# Altium PCB Display.PcbDoc
Units mm, origin at the board's own origin, x right, y up, seen from the top; angles counter-clockwise.
Board outline 50 x 50 mm, 2 copper layers (Top Layer, Bottom Layer); 9 components, 26 nets, 70 pads, 21 vias.
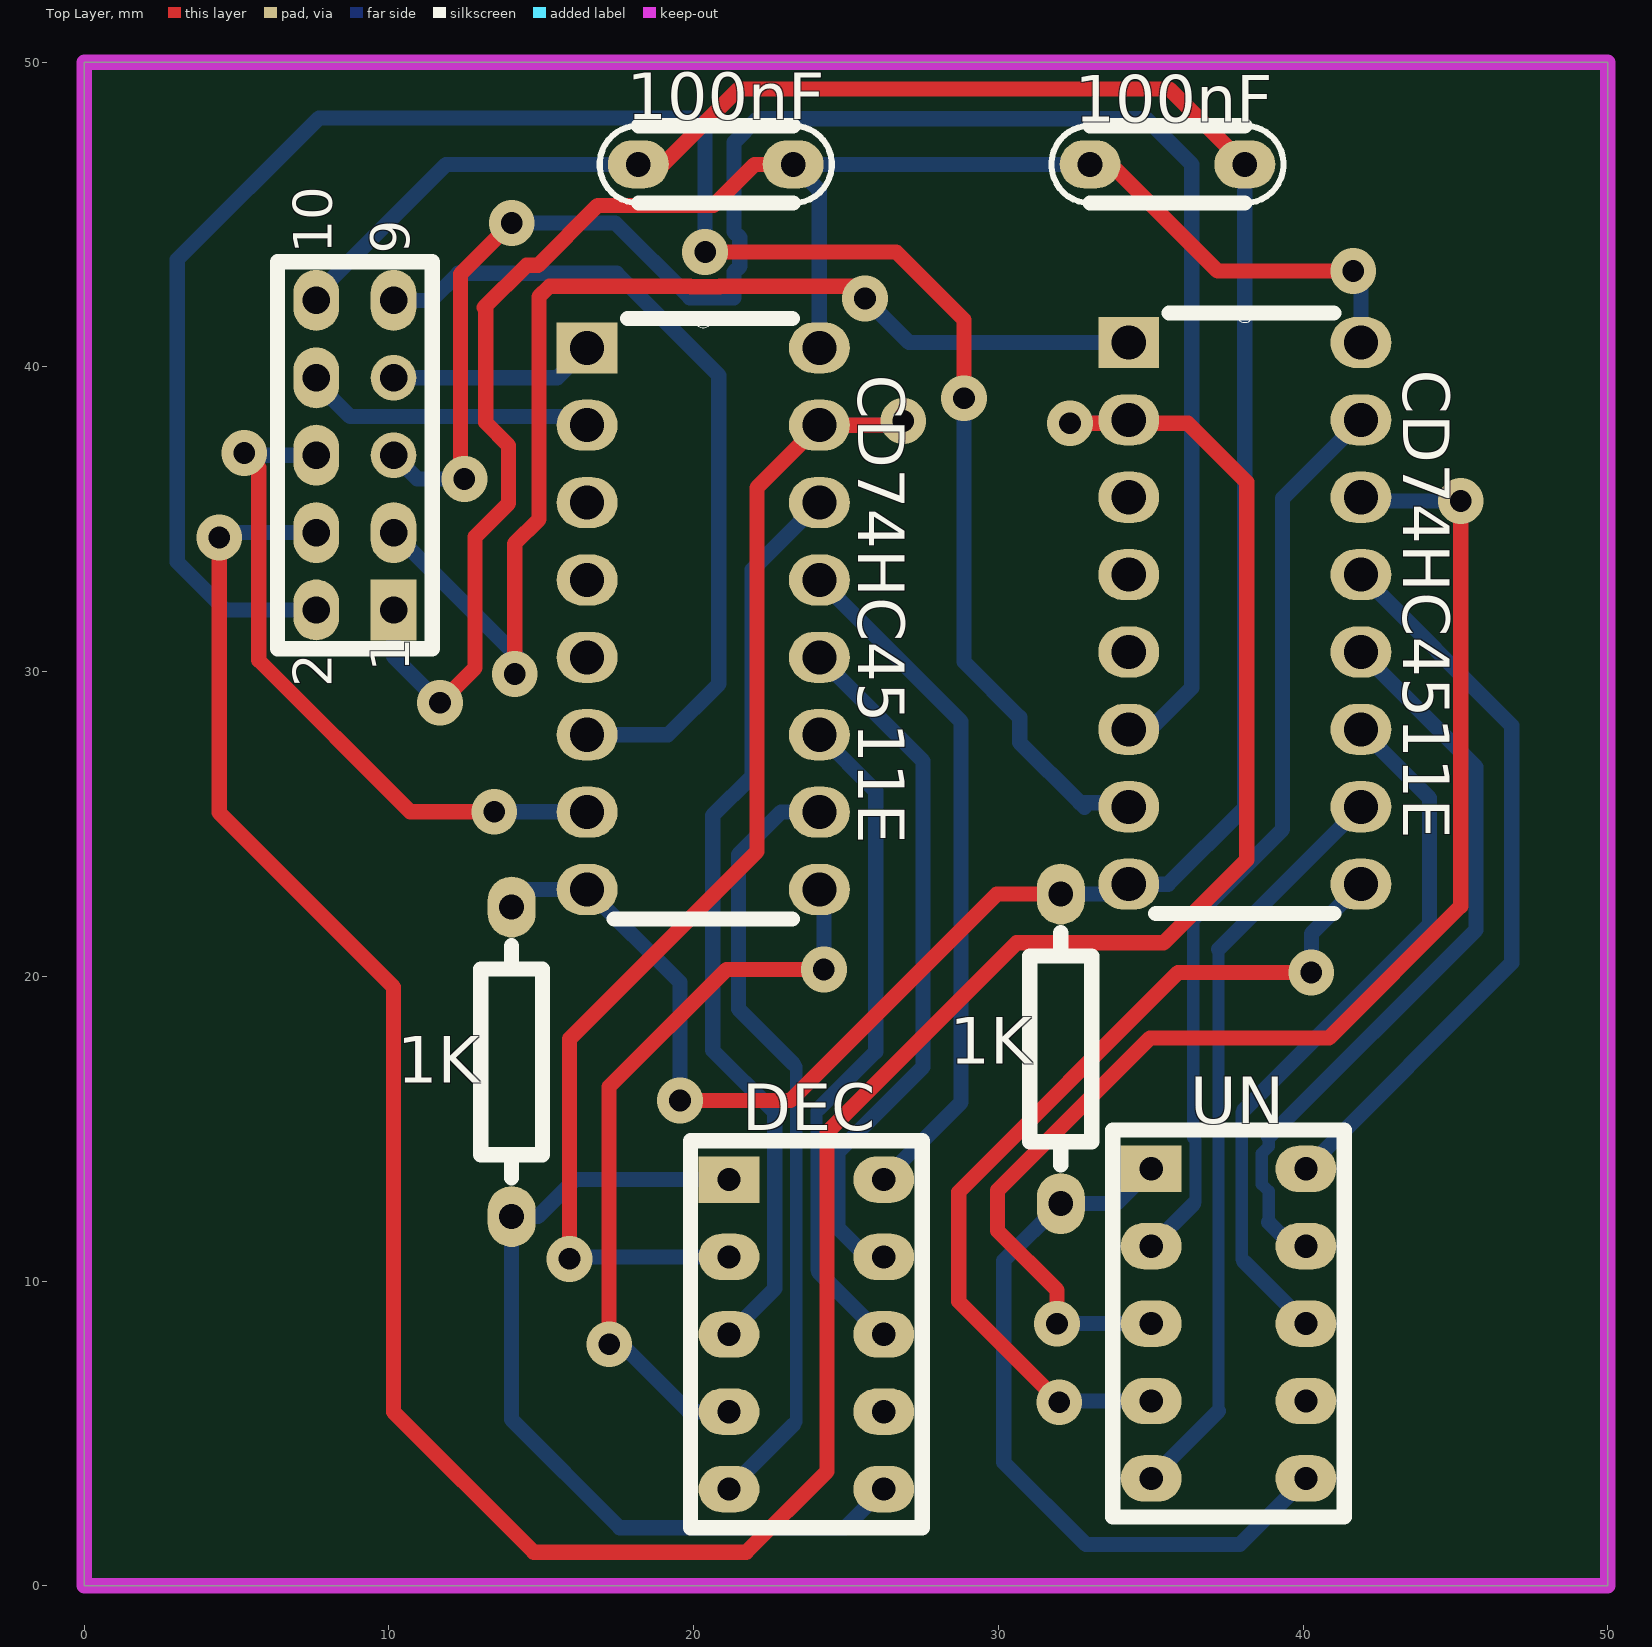
[diagram p0: Top Layer view]
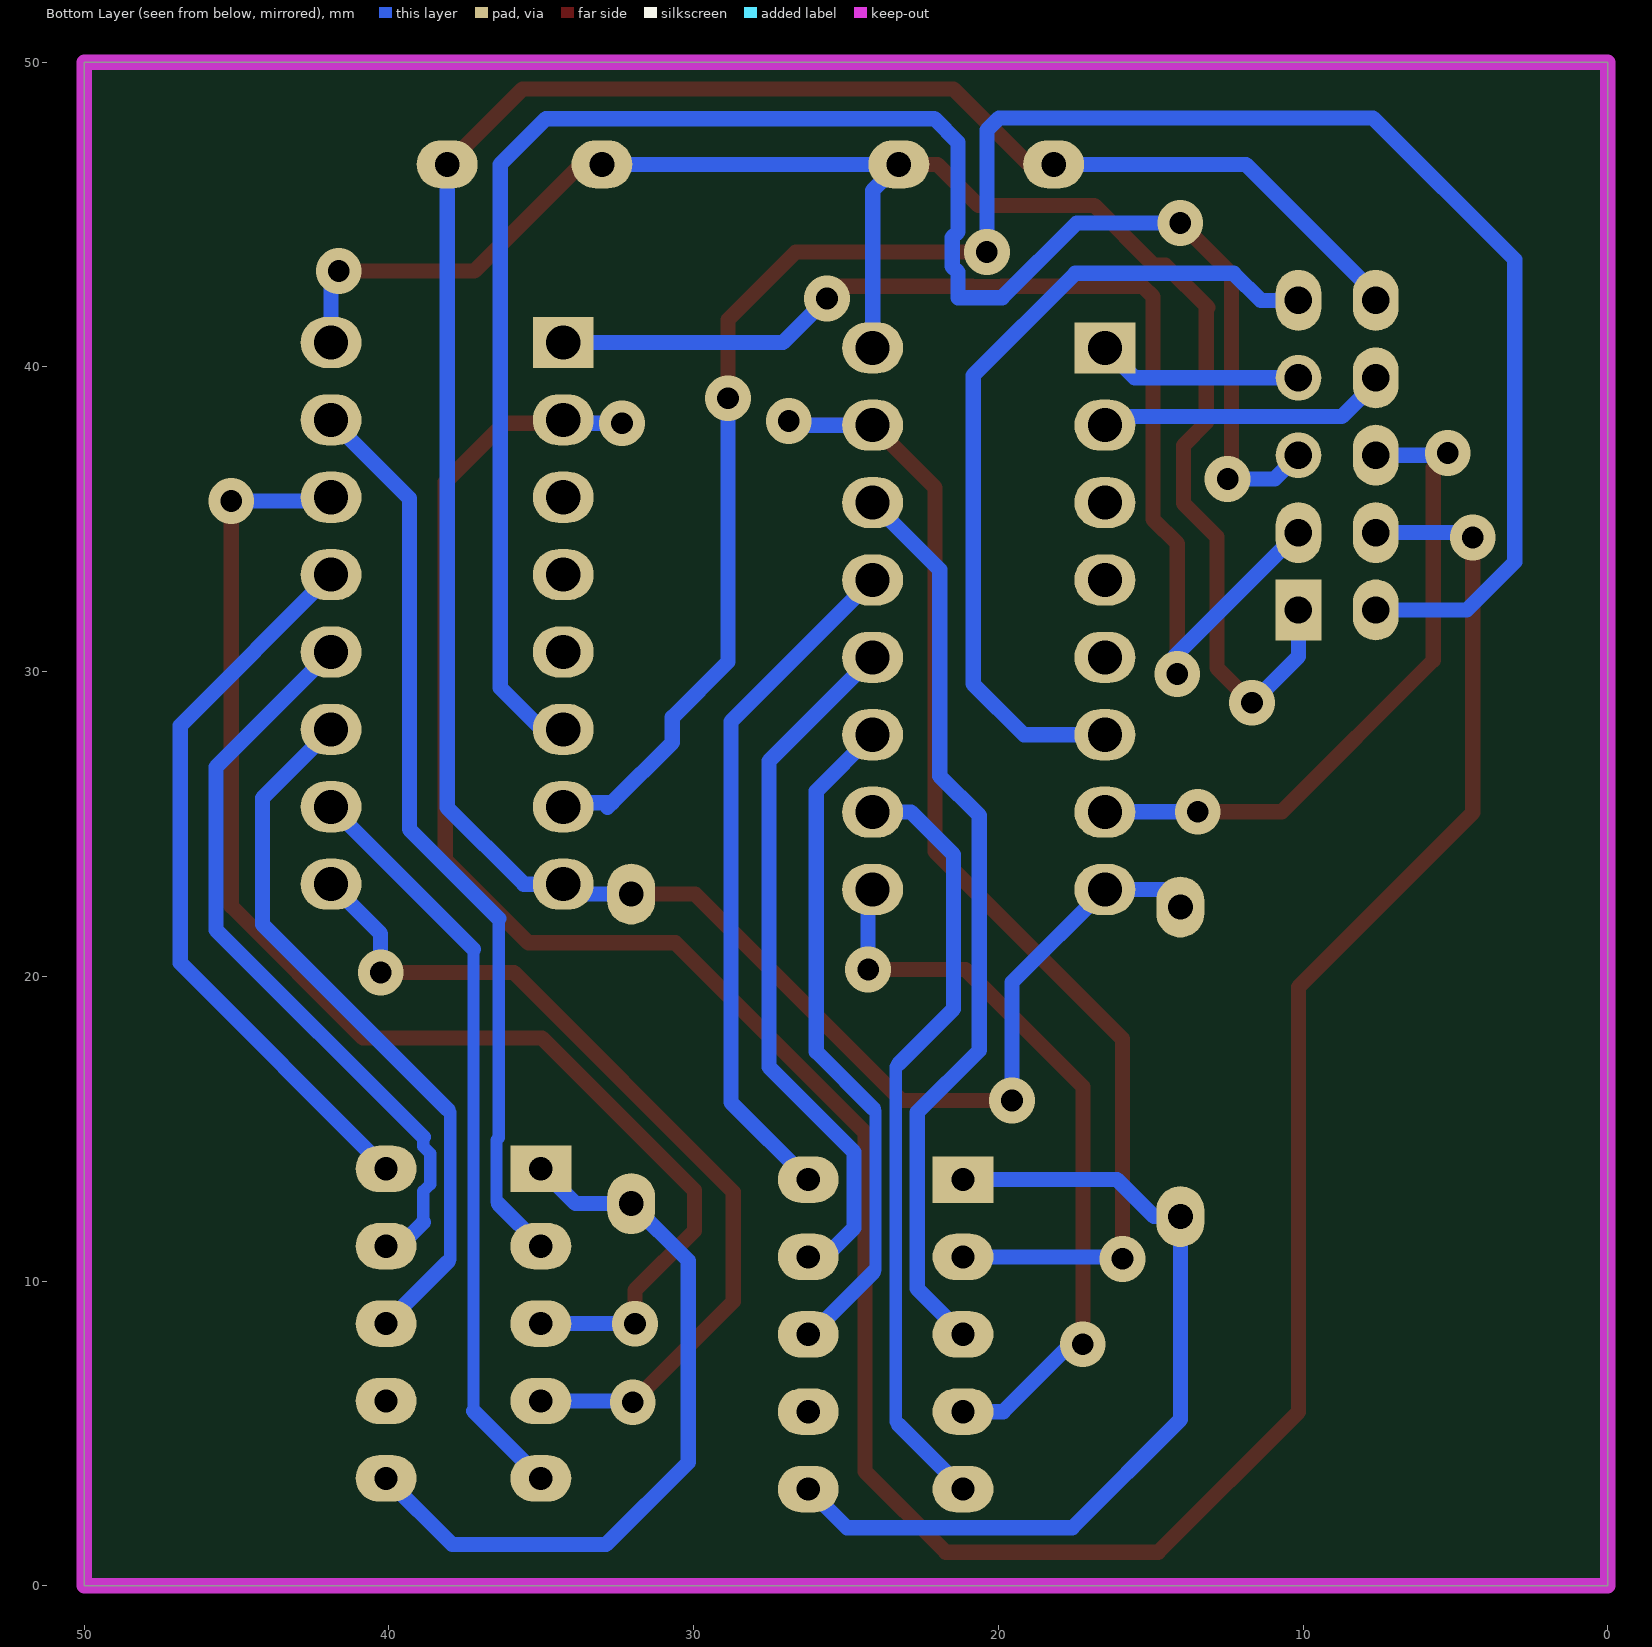
[diagram p1: Bottom Layer view, seen from below]
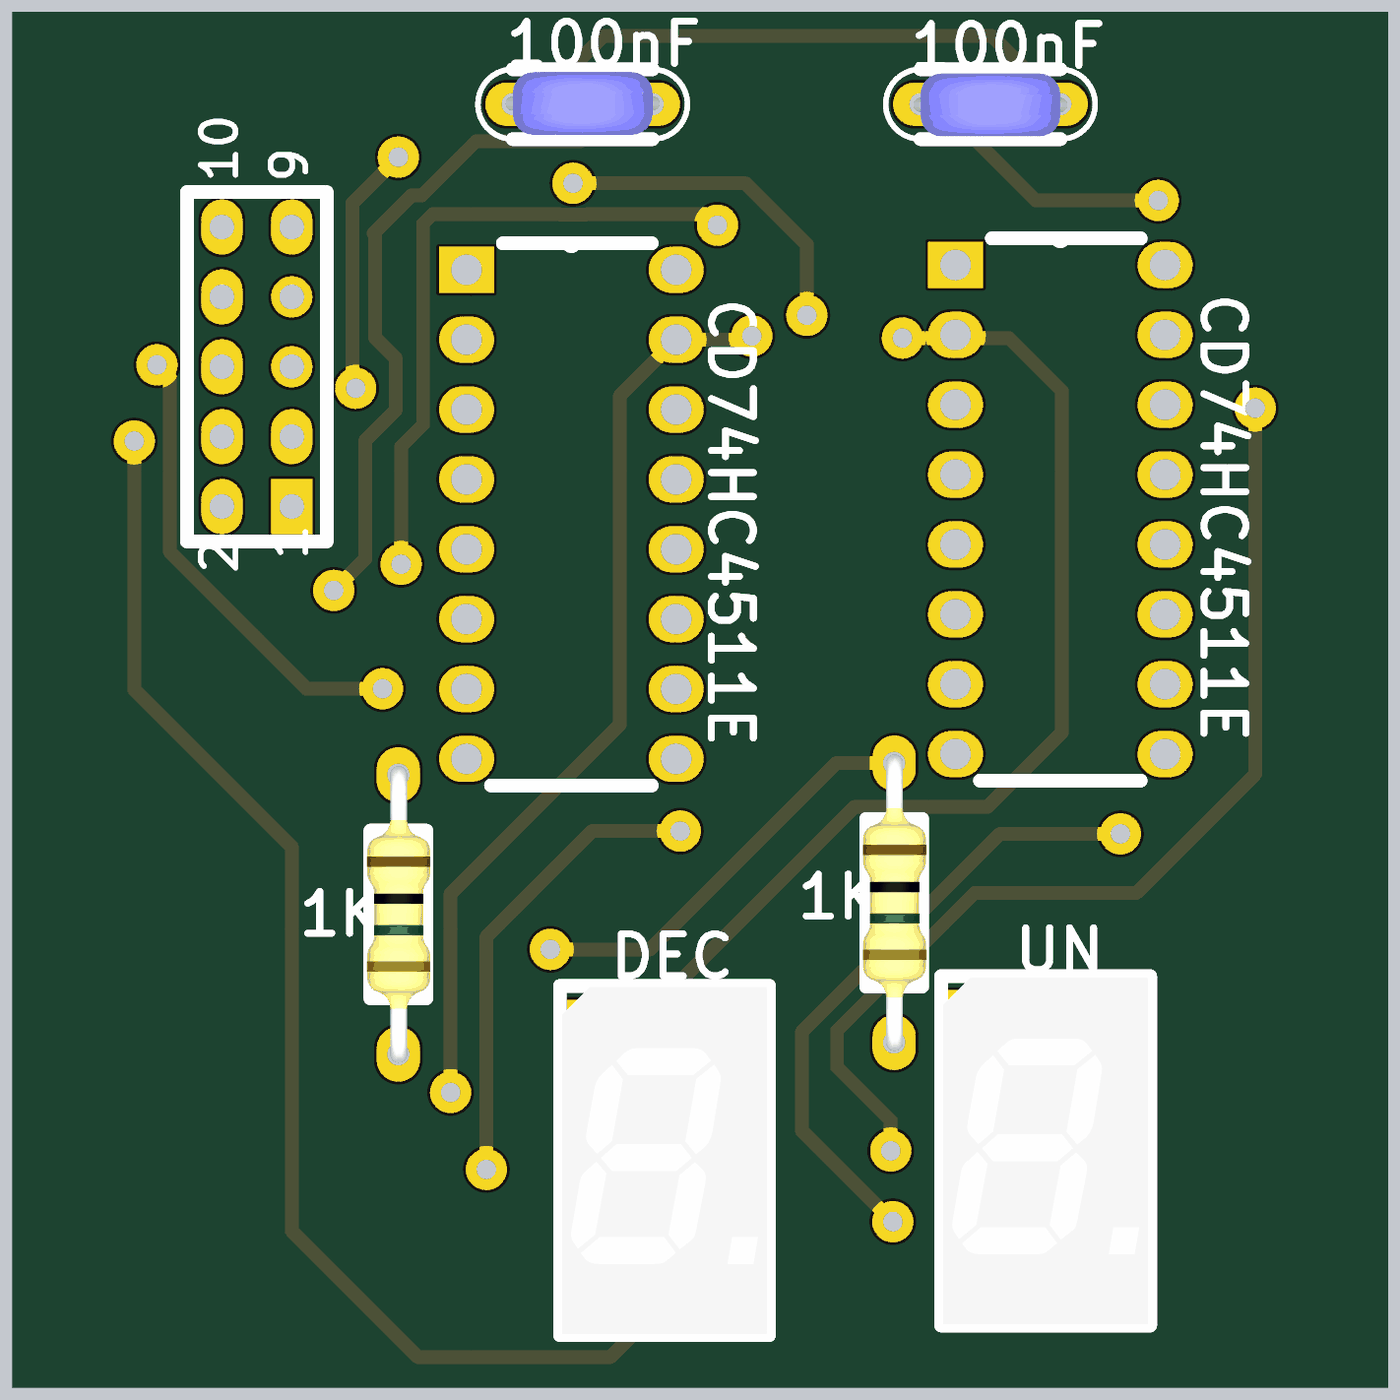
[diagram p2: 3D render of the assembled board from above, using the file's embedded part models]

## Layer stack, top to bottom
Top Solder: solder mask 0.0102, Solder Resist, Dk 3.5
Top Layer: signal copper 0.0356
Dielectric 1: dielectric 0.32, FR-4, Dk 4.8
Bottom Layer: signal copper 0.0356
Bottom Solder: solder mask 0.0102, Solder Resist, Dk 3.5

## Board outline
0,0 50,0 50,50 0,50

## Design rules (kind name [scope] priority, off if disabled: settings)
Clearance [All] p1: gap=0.254 ignorepadtopadclearanceinfootprint=FALSE except(0: Arc-Hole Track-Hole SMDPad-Hole THPad-Hole Via-Hole Fill-Hole Poly-Hole Region-Hole Text-Hole)
PolygonConnect [All] p1: connectstyle=Relief reliefconductorwidth=0.254 reliefentries=4 polygonreliefangle="90 Angle" airgapwidth=0.254
RoutingVias [All] p1: holewidth=0.711 width=1.27 viastyle="Through Hole" minholewidth=0.711 minwidth=1.27 maxholewidth=0.711 maxwidth=1.27
SolderMaskExpansion [All] p1: expansion=0.102
Width [All] p1: maxlimit=0.6 minlimit=0.254 preferedwidth=0.254
30 further rules are at their usual default settings.

## Classes and differential pairs
component class U_dual7segment: 1K CD74HC4511E DEC DEC1 DEC2 UN

## Components (designator, comment, footprint, x,y, rotation, side; value= is the part's Value field where it differs from the comment)
1K "RES" RES400 32.05,22.7 r270 top (schematic designator R1)
1K "RES" RES400 14.025,22.275 r270 top (schematic designator R2)
100nF "" CAP200 20.725,46.65 r180 top (schematic designator CAP_D5)
100nF "CAP" CAP200 35.55,46.65 r0 top (schematic designator CAP_D6)
CD74HC4511E "CD74HC4511E" *DIP254P762X508-16 41.9,23.025 r0 top (schematic designator DEC1)
CD74HC4511E "CD74HC4511E" *DIP254P762X508-16 24.125,22.85 r0 top (schematic designator DEC2)
DEC "DISPLAY 7SEG K" "DISPLAY_LED_0.3\"" 23.7,8.25 r0 top (schematic designator DISP2)
P1 "Header 5X2" HDR2X5 10.15,32.025 r90 top
UN "DISPLAY 7SEG K" "DISPLAY_LED_0.3\"" 37.557,8.602 r0 top (schematic designator DISP1)

## Footprints (in the part's own frame and the unit in brackets; to place one, negate y for a bottom-side part, rotate by r counter-clockwise, add the part's x,y. Pads: shape width x height; smd on the part's side, far side on the other; paste and mask are expansions set on the pad)
*DIP254P762X508-16 [mil]
  rect 78.74x66 hole 44: 1(-300,700)
  oval 78.74x66 hole 44: 2(-300,600) 3(-300,500) 4(-300,400) 5(-300,300) 6(-300,200) 7(-300,100) 8(-300,0) 9(0,0) 10(0,100) 11(0,200) 12(0,300) 13(0,400) 14(0,500) 15(0,600) 16(0,700)
  silkscreen extent -265,-38 -35,738
CAP200 [mil]
  oval 78.74x62 hole 32: 1(-100,0) 2(100,0)
  silkscreen extent -150,-50 150,50, body extent -110,-46 110,44, height 246
"DISPLAY_LED_0.3\"" [mil] "TOS-3104AG-B"
  rect 78.74x60 hole 30: 1(-100,200)
  oval 78.74x60 hole 30: 2(-100,100) 3(-100,0) 4(-100,-100) 5(-100,-200) 6(100,-200) 7(100,-100) 8(100,0) 9(100,100) 10(100,200)
  silkscreen extent -150,-250 150,250, body extent -147,-248 147,248, height 240
HDR2X5 [mm] "Connector; Header; 5x2 Position"
  rect 2x1.5 hole 0.9: 1(0,0)
  oval 2x1.5 hole 0.9: 2(0,2.54) 3(2.54,0) 4(2.54,2.54) 6(5.08,2.54) 8(7.62,2.54) 9(10.16,0) 10(10.16,2.54)
  round 1.5 hole 0.9: 5(5.08,0) 7(7.62,0)
  silkscreen extent -1.27,-1.27 11.43,3.81
RES400 [mil]
  oval 78.74x62 hole 32: 1(0,0) 2(400,0)
  silkscreen extent 50,-40 350,40, body extent -12,-45 412,46, height 96

## Part data
100nF: library part CAP
CD74HC4511E CD74HC4511E: "High Speed CMOS Logic BCD-to-7 Segment Latch/Decoder/Driver 16-PDIP -55 to 125"
DEC UN: "Display 7 Segmentos Catodo Común"
P1: "Header, 5-Pin, Dual row"

## Via types
v1: diameter 1.5, hole 0.711, Top Layer to Bottom Layer, 21 vias

## Nets (pads, with @x,y where several pads share a name; then routed paths per layer and width w, separated by ;. In a path a pad name is that pad's centre, name@x,y a point inside that pad or via, vN(x,y) a via of type N, cw(c..) or ccw(c..) an arc to the next point about the centre after c; other vN are vias at no path point)
GND: 1K.1 100nF.2 CD74HC4511E.8 P1.10 | length 89
  Top Layer w0.5: 100nF.2@18.185,46.65 19,46.65 21.475,49.125 35.615,49.125 100nF.2@38.09,46.65 ; v1(19.55,15.925) 23.175,15.925 29.95,22.7 1K.1@32.05,22.7
  Bottom Layer w0.5: P1.10 7.61,42.385 11.875,46.65 100nF.2@18.185,46.65 ; 1K.1@14.025,22.275 14.6,22.85 16.505,22.85 19.55,19.805 v1(19.55,15.925) ; 1K.1@32.05,22.7 33.955,22.7 34.28,23.025 35.575,23.025 38.09,25.54 100nF.2@38.09,46.65
NetDEC1_1: CD74HC4511E.1@34.28,40.805 P1.3 | length 39.3
  Top Layer w0.5: v1(14.125,29.925) 14.125,34.2 14.925,35 14.925,42.309 15.266,42.65 19.889,42.65 19.903,42.636 20.847,42.636 20.861,42.65 25.225,42.65 v1(25.625,42.25)
  Bottom Layer w0.5: P1.3 14.215,30.5 14.125,30.41 v1(14.125,29.925) ; v1(25.625,42.25) 27.07,40.805 CD74HC4511E.1@34.28,40.805
NetDEC1_2: CD74HC4511E.2@34.28,38.265 P1.4 | length 101.5
  Top Layer w0.5: v1(4.425,34.405) 4.425,25.375 10.15,19.65 10.15,5.7 14.75,1.1 21.725,1.1 24.375,3.75 24.375,14.875 30.6,21.1 35.425,21.1 38.15,23.825 38.15,36.225 36.225,38.15 v1(32.35,38.15)
  Bottom Layer w0.5: v1(4.425,34.405) 4.265,34.565 P1.4 ; v1(32.35,38.15) 34.165,38.15 CD74HC4511E.2@34.28,38.265
NetDEC1_6: CD74HC4511E.6@34.28,28.105 P1.5 | length 60.4
  Top Layer w0.5: v1(12.475,36.325) 12.35,36.45 12.35,43.05 v1(14.025,44.725)
  Bottom Layer w0.5: P1.5 10.93,36.325 v1(12.475,36.325) ; v1(14.025,44.725) 17.425,44.725 19.875,42.275 21.325,42.275 21.325,43.114 21.514,43.303 21.514,44.247 21.325,44.436 21.325,47.375 22.1,48.15 34.85,48.15 36.35,46.65 36.35,29.475 CD74HC4511E.6@34.98,28.105
NetDEC1_7: CD74HC4511E.7@34.28,25.565 P1.2 | length 67.1
  Top Layer w0.5: v1(20.375,43.775) 26.65,43.775 28.875,41.55 v1(28.875,38.975)
  Bottom Layer w0.5: P1.2 4.625,32.025 3.05,33.6 3.05,43.525 7.7,48.175 19.975,48.175 20.375,47.775 v1(20.375,43.775) ; v1(28.875,38.975) 28.875,30.325 30.7,28.5 30.7,27.675 32.675,25.7 ; 32.825,25.55 32.675,25.7 ; CD74HC4511E.7@34.145,25.7 32.675,25.7
NetDEC1_9: CD74HC4511E.9@41.9,23.025 UN.4 | length 29.4
  Top Layer w0.5: v1(32,6.025) 28.7,9.325 28.7,12.925 35.9,20.125 v1(40.275,20.125)
  Bottom Layer w0.5: v1(32,6.025) 32.037,6.062 UN.4 ; v1(40.275,20.125) 40.275,21.4 CD74HC4511E.9@41.9,23.025
NetDEC1_10: CD74HC4511E.10@41.9,25.565 UN.5 | length 24.9
  Bottom Layer w0.4: 37.225,5.73 37.225,20.89
  Bottom Layer w0.5: UN.5 37.225,5.73 ; 37.225,20.89 CD74HC4511E.10@41.9,25.565
NetDEC1_11: CD74HC4511E.11@41.9,28.105 UN.8 | length 23.9
  Bottom Layer w0.4: 38.075,10.624 37.989,10.71 37.989,15.539 38.075,15.625
  Bottom Layer w0.5: 38.075,10.624 UN.8 ; 38.075,15.625 44.15,21.7 44.15,25.855 CD74HC4511E.11@41.9,28.105
NetDEC1_12: CD74HC4511E.12@41.9,30.645 UN.9 | length 24.8
  Bottom Layer w0.4: 38.875,11.925 38.875,12.946 38.643,13.178 38.643,14.186 38.875,14.418 38.875,14.725
  Bottom Layer w0.5: 38.875,11.925 39.658,11.142 UN.9 ; 38.875,14.725 45.675,21.525 45.675,26.87 CD74HC4511E.12@41.9,30.645
NetDEC1_13: CD74HC4511E.13@41.9,33.185 UN.10 | length 24.4
  Bottom Layer w0.5: UN.10 46.85,20.435 46.85,28.235 CD74HC4511E.13@41.9,33.185
NetDEC1_14: CD74HC4511E.14@41.9,35.725 UN.3 | length 43.6
  Top Layer w0.5: v1(31.925,8.6) 31.925,9.7 29.975,11.65 29.975,12.975 34.975,17.975 40.85,17.975 45.175,22.3 v1(45.175,35.6)
  Bottom Layer w0.5: v1@32.327,8.602 UN.3 ; CD74HC4511E.14@41.9,35.725 42.025,35.6 v1(45.175,35.6)
NetDEC1_15: CD74HC4511E.15@41.9,38.265 UN.2 | length 30
  Bottom Layer w0.4: 36.4,12.525 36.471,12.596 36.471,14.632 36.4,14.703 36.4,21.9
  Bottom Layer w0.5: UN.2 36.4,12.525 ; 36.4,21.9 39.325,24.825 39.325,35.69 CD74HC4511E.15@41.9,38.265
NetDEC2_1: CD74HC4511E.1@16.505,40.63 P1.7 | length 6.8
  Bottom Layer w0.5: P1.7 15.52,39.645 CD74HC4511E.1@16.505,40.63
NetDEC2_2: CD74HC4511E.2@16.505,38.09 P1.8 | length 9.6
  Bottom Layer w0.5: P1.8 7.61,39.49 8.725,38.375 16.22,38.375 CD74HC4511E.2@16.505,38.09
NetDEC2_6: CD74HC4511E.6@16.505,27.93 P1.9 | length 27.6
  Bottom Layer w0.5: P1.9 11.385,42.185 12.275,43.075 17.475,43.075 20.825,39.725 20.825,29.6 19.155,27.93 CD74HC4511E.6@16.505,27.93
NetDEC2_7: CD74HC4511E.7@16.505,25.39 P1.6 | length 22.2
  Top Layer w0.5: v1(5.25,37.175) 5.725,36.7 5.725,30.375 10.7,25.4 v1(13.45,25.4)
  Bottom Layer w0.5: v1(5.25,37.175) 5.32,37.105 P1.6 ; v1(13.45,25.4) 16.495,25.4 CD74HC4511E.7@16.505,25.39
NetDEC2_9: CD74HC4511E.9@24.125,22.85 DEC.4 | length 24.6
  Top Layer w0.5: v1(17.225,7.925) 17.225,16.375 21.075,20.225 v1(24.275,20.225)
  Bottom Layer w0.5: v1(17.225,7.925) 17.625,7.925 19.84,5.71 DEC.4 ; CD74HC4511E.9@24.125,22.85 24.275,22.7 v1(24.275,20.225)
NetDEC2_10: CD74HC4511E.10@24.125,25.39 DEC.5 | length 25.8
  Bottom Layer w0.4: 23.275,5.285 23.368,5.378 23.368,17.032 23.275,17.125
  Bottom Layer w0.5: DEC.5 23.275,5.285 ; 23.275,17.125 21.475,18.925 21.475,24 22.865,25.39 CD74HC4511E.10@24.125,25.39
NetDEC2_11: CD74HC4511E.11@24.125,27.93 DEC.8 | length 22.2
  Bottom Layer w0.4: 24.1,10.3 24.032,10.368 24.032,15.582 24.1,15.65
  Bottom Layer w0.5: 24.1,10.3 26.15,8.25 DEC.8 ; 24.1,15.65 25.975,17.525 25.975,26.08 CD74HC4511E.11@24.125,27.93
NetDEC2_12: CD74HC4511E.12@24.125,30.47 DEC.9 | length 23.2
  Bottom Layer w0.5: CD74HC4511E.12@24.125,30.47 27.525,27.07 27.525,17.025 24.736,14.236 24.736,11.739 25.685,10.79 DEC.9
NetDEC2_13: CD74HC4511E.13@24.125,33.01 DEC.10 | length 22.7
  Bottom Layer w0.5: CD74HC4511E.13@24.125,33.01 28.775,28.36 28.775,15.865 DEC.10
NetDEC2_14: CD74HC4511E.14@24.125,35.55 DEC.3 | length 30.2
  Bottom Layer w0.5: DEC.3 22.664,9.754 22.664,15.536 20.625,17.575 20.625,25.275 21.925,26.575 21.925,33.35 CD74HC4511E.14@24.125,35.55
NetDEC2_15: CD74HC4511E.15@24.125,38.09 DEC.2 | length 41.6
  Top Layer w0.5: v1(15.925,10.725) 15.925,17.95 22.075,24.1 22.075,36.04 24.125,38.09 26.74,38.09 v1(26.875,38.225)
  Bottom Layer w0.5: v1(15.925,10.725) 15.99,10.79 DEC.2 ; CD74HC4511E.15@24.125,38.09 26.74,38.09 v1(26.875,38.225)
NetDISP1_1: 1K.2@32.05,12.54 UN.1 UN.6 | length 24.6
  Bottom Layer w0.5: UN.1 33.875,12.54 32.05,12.54 30.175,10.665 30.175,4.05 32.875,1.35 37.925,1.35 UN.6
NetDISP2_1: 1K.2@14.025,12.115 DEC.1 DEC.6 | length 28.5
  Bottom Layer w0.5: DEC.1 16.105,13.33 14.89,12.115 14.025,12.115 14.025,5.45 17.575,1.9 24.97,1.9 DEC.6
VCC: 100nF.1 CD74HC4511E.16 P1.1 | length 58.7
  Top Layer w0.5: v1(11.675,28.975) 12.825,30.125 12.825,34.425 13.925,35.525 13.925,37.425 13.175,38.175 13.175,41.9 13.125,41.95 14.513,43.338 14.888,43.338 16.85,45.3 20.65,45.3 22,46.65 100nF.1@23.265,46.65 ; 100nF.1@33.01,46.65 33.7,46.65 37.2,43.15 v1(41.65,43.15)
  Bottom Layer w0.5: P1.1 10.15,30.5 v1(11.675,28.975) ; CD74HC4511E.16@24.125,40.63 24.125,45.79 23.265,46.65 100nF.1@33.01,46.65 ; v1(41.65,43.15) 41.9,42.9 CD74HC4511E.16@41.9,40.805
pads on no net: CD74HC4511E.3 CD74HC4511E.4 CD74HC4511E.5 DEC.7 UN.7

## Keep-outs
Keep-Out Layer:
  the board outline again, w0.5

## Text inside footprints (layer, text, board x,y; h text height)
P1: Top Overlay "2" at 8.118,29.485 h1.27 r90; Top Overlay "1" at 10.658,29.993 h1.27 r90; Top Overlay "9" at 10.658,43.709 h1.27 r90; Top Overlay "10" at 8.118,43.709 h1.27 r90